# EAGLE board Oskar.Kuchejda (EAGLE 9.6.2)
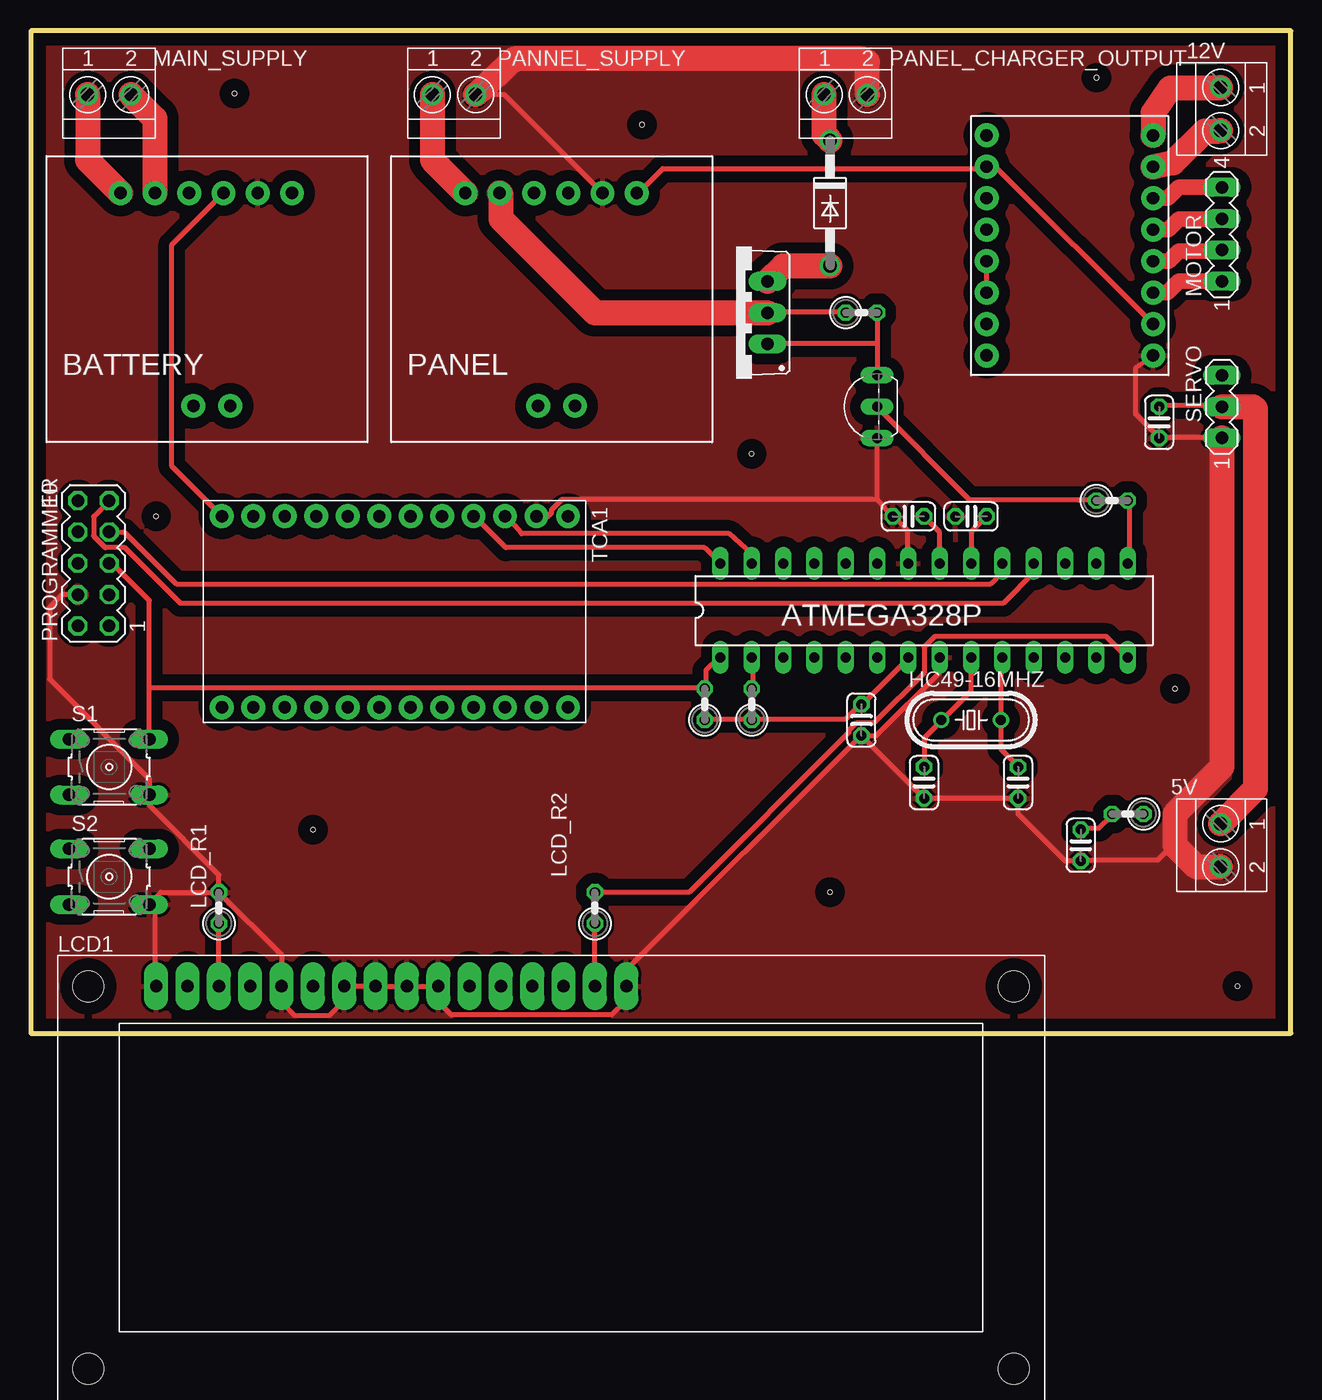
[diagram p0: board, top side]
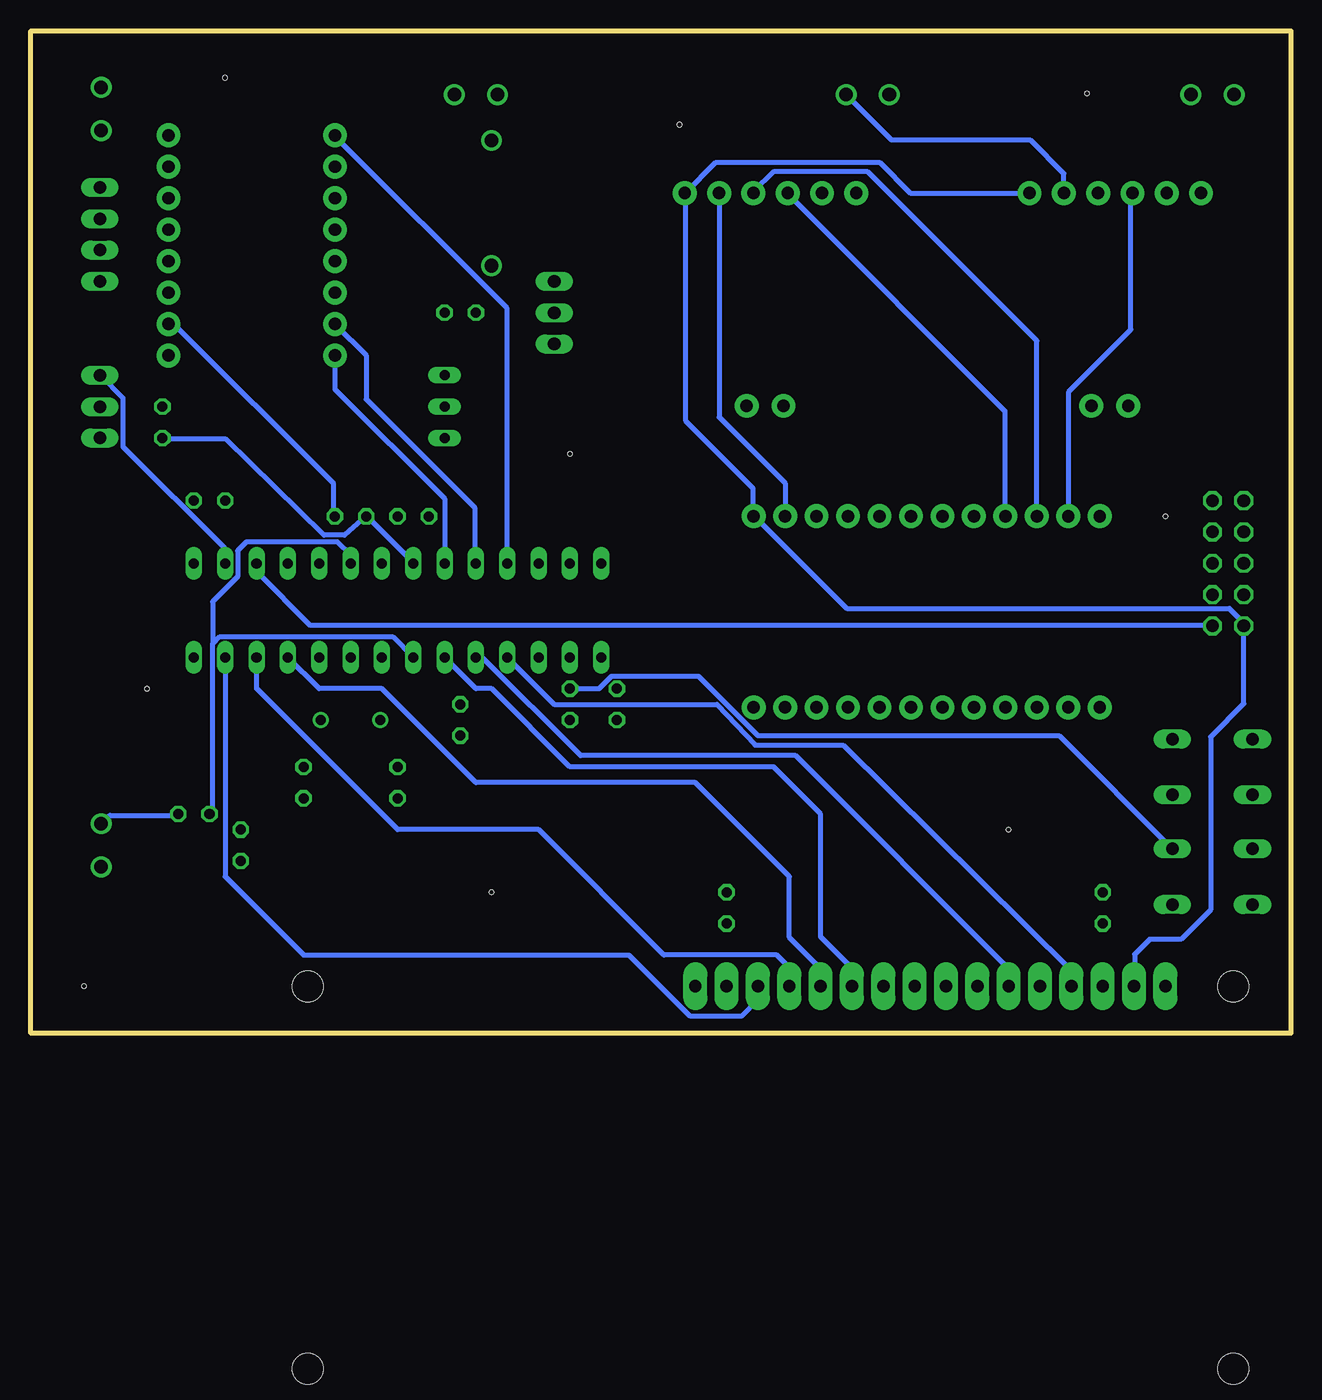
[diagram p1: board, bottom side, seen from below]

Size 102.11 x 81.27 mm. Coordinates in mm from the lower left corner, seen from the top.
Outline: 0,0 102.11,0 102.11,81.27 0,81.27 0,0
Copper layers (1*16): Top 0.035mm / dielectric 1.5mm / Bottom 0.035mm
Design rules "default": minimum track width 6mil, minimum drill 0.35mm, track to track 6mil, track to pad 6mil, pad to pad 6mil, via to via 6mil, smd to smd 6mil, copper to edge 40mil, drill to drill 6mil, minimum pad ring 10mil, minimum via ring 8mil, stop-mask expansion 4mil, vias tented up to drill 0mil, thermal gap 10mil
Holes 0.35 mm at 97.79,3.81 86.36,77.47 49.53,73.66 16.51,76.2 58.42,46.99 22.86,16.51 10.16,41.91 64.77,11.43 92.71,27.94

## Footprints (pad centres in the part's own frame; a part is rotated, then mirrored left to right if it is on the bottom)
0207/2V = drill 0.813 octagon: 1 -1.27,0; 2 1.27,0
TERMINAL-BLOCK-2-PIN-3.5MM-ROUND-PAD = drill 1.1 pad 1.7: 1 -1.75,-0.1; 2 1.75,-0.1
DIL28-3 = drill 0.813 long: 1 -16.51,-3.81; 2 -13.97,-3.81; 3 -11.43,-3.81; 4 -8.89,-3.81; 5 -6.35,-3.81; 6 -3.81,-3.81; 7 -1.27,-3.81; 8 1.27,-3.81; 9 3.81,-3.81; 10 6.35,-3.81; 11 8.89,-3.81; 12 11.43,-3.81; 13 13.97,-3.81; 14 16.51,-3.81; 15 16.51,3.81; 16 13.97,3.81; 17 11.43,3.81; 18 8.89,3.81; 19 6.35,3.81; 20 3.81,3.81; 21 1.27,3.81; 22 -1.27,3.81; 23 -3.81,3.81; 24 -6.35,3.81; 25 -8.89,3.81; 26 -11.43,3.81; 27 -13.97,3.81; 28 -16.51,3.81
INA219 = drill 1 pad 1.93: 2VIN+ 20.25,11.9; 2VIN- 20.25,14.89; GND 3,17.12; SCL 3,14.34; SDA 3,11.56; VCC 3,19.9; VIN+ 3,6; VIN- 3,8.78
C025-024X044 = drill 0.813 octagon: 1 -1.27,0; 2 1.27,0
HC49/S = drill 0.813: 1 -2.413,0; 2 2.413,0
TO220BV = drill 1.016 long: D 0,-2.54; G -2.54,-2.54; S 2.54,-2.54
HY-1602F = drill 1 pad 1.93 long: 1 2.54,0; 2 5.08,0; 3 7.62,0; 4 10.16,0; 5 12.7,0; 6 15.24,0; 7 17.78,0; 8 20.32,0; 9 22.86,0; 10 25.4,0; 11 27.94,0; 12 30.48,0; 13 33.02,0; 14 35.56,0; 15 38.1,0; 16 40.64,0 | hole 2.5: -2.96,0; 72.04,0; -2.96,-31; 72.04,-31
MA04-1 = drill 1.016 long: 1 -3.81,0; 2 -1.27,0; 3 1.27,0; 4 3.81,0
A4988 = drill 1 pad 1.93: 1A 14.75,9.26; 1B 14.75,6.71; 2A 14.75,11.81; 2B 14.75,14.36; DIR 1.26,1.61; EN 1.26,19.46; GND 14.75,1.61; GNDM 14.75,16.91; MS1 1.26,16.91; MS2 1.26,14.36; MS3 1.26,11.81; RST 1.26,9.26; SLP 1.26,6.71; STEP 1.26,4.16; VDD 14.75,4.16; VMOT 14.75,19.46
DO41-10 = drill 1.118: A 5.08,0; C -5.08,0
MA05-2 = drill 1.016 octagon: 1 -5.08,-1.27; 2 -5.08,1.27; 3 -2.54,-1.27; 4 -2.54,1.27; 5 0,-1.27; 6 0,1.27; 7 2.54,-1.27; 8 2.54,1.27; 9 5.08,-1.27; 10 5.08,1.27
B3F-10XX = drill 1.016 long: 1 -3.251,2.261; 2 3.251,2.261; 3 -3.251,-2.261; 4 3.251,-2.261
MA03-1 = drill 1.016 long: 1 -2.54,0; 2 0,0; 3 2.54,0
TO92-EBC-OVAL = drill 0.813 long: B 0,-1.27; C 2.54,-1.27; E -2.54,-1.27
TCA9548A = drill 1 pad 1.93: A0 1.26,16.81; A1 1.26,14.26; A2 1.26,11.71; GND 1.26,27.01; RST 1.26,19.36; SC0 1.26,6.61; SC1 1.26,1.51; SC2 16.76,4.06; SC3 16.76,9.16; SC4 16.76,14.26; SC5 16.76,19.36; SC6 16.76,24.46; SC7 16.76,29.56; SCL 1.26,21.91; SD0 1.26,9.16; SD1 1.26,4.06; SD2 16.76,1.51; SD3 16.76,6.61; SD4 16.76,11.71; SD5 16.76,16.81; SD6 16.76,21.91; SD7 16.76,27.01; SDA 1.26,24.46; VIN 1.26,29.56

## Placement (x,y rotation side)
2N2222_RESISTOR  1k  [0207/2V]  87.63,43.18 0 top
5V  TERMINAL-BLOCK-3.5MM-2-PIN-ROUND-PAD  [TERMINAL-BLOCK-2-PIN-3.5MM-ROUND-PAD]  96.52,15.24 270 top
12V  TERMINAL-BLOCK-3.5MM-2-PIN-ROUND-PAD  [TERMINAL-BLOCK-2-PIN-3.5MM-ROUND-PAD]  96.52,74.93 270 top
ATMEGA328P  MEGA8-P  [DIL28-3]  72.39,34.29 0 top
BATTERY  INA219  [INA219]  1.27,71.12 270 top
CAP_5V  1nf  [C025-024X044]  85.09,15.24 90 top
CAP_AREF  1nf  [C025-024X044]  71.12,41.91 0 top
CAP_SERVO  1nf  [C025-024X044]  91.44,49.53 90 top
CAP_VCC  1nf  [C025-024X044]  67.31,25.4 270 top
HC49-16MHZ  [HC49/S]  76.2,25.4 0 top
IND_C1NF  1nf  [C025-024X044]  76.2,41.91 0 top
IRLZ44N  IRF540  [TO220BV]  57.15,58.42 90 top
LCD1  LCD_2X16_SIL  [HY-1602F]  7.62,3.81 0 top
LCD_R1  2k  [0207/2V]  15.24,10.16 90 top
LCD_R2  1k  [0207/2V]  45.72,10.16 90 top
LOGIC_LEVEL_R  10k  [0207/2V]  67.31,58.42 0 top
MAIN_R  26  [0207/2V]  88.9,17.78 180 top
MAIN_SUPPLY  TERMINAL-BLOCK-3.5MM-2-PIN-ROUND-PAD  [TERMINAL-BLOCK-2-PIN-3.5MM-ROUND-PAD]  6.35,76.2 0 top
MOTOR  [MA04-1]  96.52,64.77 90 top
MOTOR_DRIVER  A4988  [A4988]  76.2,53.34 0 top
OSC_C1  22pf  [C025-024X044]  72.39,20.32 90 top
OSC_C2  22pf  [C025-024X044]  80.01,20.32 90 top
PANEL  INA219  [INA219]  29.21,71.12 270 top
PANEL_CHARGER_OUTPUT  TERMINAL-BLOCK-3.5MM-2-PIN-ROUND-PAD  [TERMINAL-BLOCK-2-PIN-3.5MM-ROUND-PAD]  66.04,76.2 0 top
PANEL_DIODE  1N4004  [DO41-10]  64.77,67.31 270 top
PANNEL_SUPPLY  TERMINAL-BLOCK-3.5MM-2-PIN-ROUND-PAD  [TERMINAL-BLOCK-2-PIN-3.5MM-ROUND-PAD]  34.29,76.2 0 top
PROGRAMMER  [MA05-2]  5.08,38.1 90 top
RESET_R  10k  [0207/2V]  54.61,26.67 90 top
RESET_R1  10k  [0207/2V]  58.42,26.67 90 top
S1  [B3F-10XX]  6.35,21.59 0 top
S2  [B3F-10XX]  6.35,12.7 0 top
SERVO  [MA03-1]  96.52,50.8 90 top
T1  2N2222  [TO92-EBC-OVAL]  67.31,50.8 90 top
TCA1  TCA9548A  [TCA9548A]  13.97,43.18 270 top

## Library data of the parts
2N2222_RESISTOR LCD_R1 LCD_R2 LOGIC_LEVEL_R MAIN_R RESET_R RESET_R1 = rcl; SPICEPREFIX: R
5V 12V MAIN_SUPPLY PANEL_CHARGER_OUTPUT PANNEL_SUPPLY = Rembrandt Electronics - Terminal Block 3-5mm v1-0
ATMEGA328P = atmel; OC_FARNELL: unknown; OC_NEWARK: unknown
BATTERY MOTOR_DRIVER PANEL TCA1 = TrackerSłonecznyLIB
CAP_5V CAP_AREF CAP_SERVO CAP_VCC IND_C1NF OSC_C1 OSC_C2 = rcl; SPICEPREFIX: C
HC49-16MHZ = crystal
IRLZ44N = transistor-power
LCD1 = lcd_2x16_led_backlight
MOTOR PROGRAMMER SERVO = con-lstb; OC_FARNELL: unknown; OC_NEWARK: unknown
PANEL_DIODE = diode
S1 S2 = switch-omron; MPN: B3F-1000; OC_FARNELL: 176432; OC_NEWARK: 36M3542
T1 = adafruit

## Nets
5V: ATMEGA328P.7 ATMEGA328P.20 BATTERY.VCC CAP_5V.2 CAP_VCC.1 IND_C1NF.2 LCD1.2 MAIN_R.2 MOTOR_DRIVER.MS1 MOTOR_DRIVER.VDD PANEL.VCC PROGRAMMER.2 RESET_R1.1 RESET_R.1 TCA1.VIN
GND: 5V.2 ATMEGA328P.8 ATMEGA328P.22 BATTERY.GND CAP_5V.1 CAP_AREF.1 CAP_SERVO.1 CAP_VCC.2 IND_C1NF.1 LCD1.1 LCD1.5 LCD1.7 LCD1.8 LCD1.9 LCD1.10 LCD1.16 LCD_R1.2 MOTOR_DRIVER.GND OSC_C1.1 OSC_C2.1 PANEL.GND PANEL_CHARGER_OUTPUT.2 PANNEL_SUPPLY.2 PROGRAMMER.4 S1.4 S2.4 SERVO.1 T1.E TCA1.GND
N$1: BATTERY.SCL TCA1.SC1
N$2: ATMEGA328P.9 HC49-16MHZ.1 OSC_C1.2
N$3: ATMEGA328P.10 HC49-16MHZ.2 OSC_C2.2
N$4: 2N2222_RESISTOR.2 ATMEGA328P.15
N$5: ATMEGA328P.16 SERVO.3
N$6: 5V.1 CAP_SERVO.2 MAIN_R.1 SERVO.2
N$7: BATTERY.SDA TCA1.SD1
N$8: ATMEGA328P.6 LCD1.11
N$9: MOTOR.1 MOTOR_DRIVER.1B
N$10: MOTOR.2 MOTOR_DRIVER.1A
N$11: ATMEGA328P.11 LCD1.12
N$12: ATMEGA328P.12 LCD1.13
N$13: ATMEGA328P.13 LCD1.14
N$14: PANEL.SDA TCA1.SD0
N$15: PANEL.SCL TCA1.SC0
N$16: MOTOR.3 MOTOR_DRIVER.2A
N$17: PANEL.VIN+ PANNEL_SUPPLY.1
N$18: ATMEGA328P.4 LCD1.4
N$19: BATTERY.VIN+ MAIN_SUPPLY.1
N$20: ATMEGA328P.27 TCA1.SDA
N$21: ATMEGA328P.28 TCA1.SCL
N$22: BATTERY.VIN- MAIN_SUPPLY.2
N$23: IRLZ44N.D LOGIC_LEVEL_R.1 PANEL.VIN-
N$24: ATMEGA328P.14 LCD_R2.2
N$25: ATMEGA328P.21 CAP_AREF.2
N$26: ATMEGA328P.1 PROGRAMMER.5 RESET_R.2 S1.2
N$27: MOTOR.4 MOTOR_DRIVER.2B
N$28: IRLZ44N.G LOGIC_LEVEL_R.2 T1.C
N$29: 12V.2 MOTOR_DRIVER.GNDM
N$30: 12V.1 MOTOR_DRIVER.VMOT
N$31: MOTOR_DRIVER.RST MOTOR_DRIVER.SLP
N$32: ATMEGA328P.23 MOTOR_DRIVER.DIR
N$33: ATMEGA328P.24 MOTOR_DRIVER.STEP
N$34: ATMEGA328P.25 MOTOR_DRIVER.EN
N$35: 2N2222_RESISTOR.1 T1.B
N$36: ATMEGA328P.2 RESET_R1.2 S2.2
N$38: PANEL_CHARGER_OUTPUT.1 PANEL_DIODE.C
N$39: IRLZ44N.S PANEL_DIODE.A
N$40: LCD1.15 LCD_R2.1
N$41: ATMEGA328P.17 PROGRAMMER.1
N$43: ATMEGA328P.19 PROGRAMMER.7
N$44: ATMEGA328P.18 PROGRAMMER.9
N$45: ATMEGA328P.5 LCD1.6
N$47: LCD1.3 LCD_R1.1

## Tracks (layer width: path | path; a pad name or v marks a point on that pad's centre or on a via)
5V
  Top 0.406: MOTOR_DRIVER.VDD 90.83,57.61 78.33,70.1 77.57,70.1 MOTOR_DRIVER.MS1 77.42,70.1 51.21,70.1 49.23,68.12 PANEL.VCC | ATMEGA328P.20 76.2,40.69 77.42,41.91 IND_C1NF.2 | CAP_5V.2 85.19,16.61 86.56,16.61 87.63,17.68 MAIN_R.2 | RESET_R.1 54.71,25.45 58.37,25.45 RESET_R1.1 58.52,25.45 65.99,25.45 67.21,26.67 CAP_VCC.1 67.36,26.67 71.17,30.48 ATMEGA328P.7
  Bottom 0.406: ATMEGA328P.20 76.2,38.76 77.27,39.83 84.63,39.83 85.34,39.12 85.34,37.02 87.38,34.99 87.38,31.56 | MOTOR_DRIVER.VDD 90.52,57.5 77.57,44.55 77.57,41.91 IND_C1NF.2 | LCD1.2 12.65,3.81 12.65,6.4 11.43,7.62 8.89,7.62 6.5,10.01 6.5,24.03 3.81,26.72 PROGRAMMER.2 3.81,33.27 4.98,34.44 35.97,34.44 43.43,41.91 TCA1.VIN 43.59,42.06 43.59,44.2 49.07,49.68 49.07,67.97 PANEL.VCC 49.07,68.12 46.58,70.61 33.33,70.61 30.84,68.12 21.18,68.12 BATTERY.VCC | ATMEGA328P.7 72.8,32.16 86.78,32.16 87.38,31.56 | MAIN_R.2 87.38,18.03 87.38,31.56
GND
  Top 0.406: LCD1.16 48.16,3.81 48.16,2.59 47.09,1.52 34.04,1.52 33.02,2.54 LCD1.10 LCD1.9 LCD1.8 LCD1.7 25.4,2.69 24.13,1.42 21.44,1.42 20.32,2.54 LCD1.5 20.32,6.35 LCD_R1.2 | LCD_R1.2 10.52,11.43 9.6,10.52 S2.4 9.6,10.36 10.06,9.91 10.06,3.81 LCD1.1 | LCD_R1.2 15.24,12.85 9.6,18.49 S1.4 9.6,20.62 1.52,28.7 1.52,34.54 2.54,35.56 PROGRAMMER.4 | CAP_VCC.2 OSC_C1.1 OSC_C2.1 80.01,17.78 83.82,13.97 CAP_5V.1 85.19,14.02 91.29,14.02 91.9,14.63 92.71,15.24 | CAP_VCC.2 68.53,24.13 73.66,29.26 ATMEGA328P.8 | CAP_VCC.2 67.36,24.23 48.26,5.13 LCD1.16 | 91.44,48.31 95.56,48.31 SERVO.1 | 91.44,48.31 89.53,50.22 89.56,50.24 89.56,53.95 MOTOR_DRIVER.GND | 91.44,48.31 CAP_SERVO.1 | PANEL.GND 38.35,76.1 PANNEL_SUPPLY.2 | ATMEGA328P.22 71.02,38.1 71.02,40.84 69.95,41.91 CAP_AREF.1 69.8,41.91 68.58,43.31 | 68.58,43.31 T1.E | 41,42.06 TCA1.GND 41.91,41.91 42.21,42.21 42.21,42.47 43.05,43.31 68.58,43.31 | 48.31,3.81 LCD1.16
  Top 2.032: PANEL_CHARGER_OUTPUT.2 67.79,78.76 67.31,78.99 39.18,78.99 PANNEL_SUPPLY.2 | SERVO.1 96.52,21.59 92.71,17.78 92.71,15.24 94.46,13.49 5V.2
  Bottom 0.406: BATTERY.GND 18.39,69.7 21.13,72.44 32.36,72.44 35.97,76.05 PANNEL_SUPPLY.2 | ATMEGA328P.22 71.02,38.1 74.83,41.91 IND_C1NF.1 74.98,41.91 76.68,40.39 78.36,40.39 86.31,48.16 91.44,48.16 CAP_SERVO.1 | PANEL.GND 46.33,67.97 46.33,49.94 40.98,44.59 TCA1.GND
  pour Top (isolate 0.889): 0,0 0,81.28 101.6,81.28 102.87,81.28 102.87,0
N$1
  Top 0.406: TCA1.SC1 11.43,45.97 11.43,63.94 BATTERY.SCL
N$2
  Top 0.406: OSC_C1.2 72.39,23.93 73.76,25.3 HC49-16MHZ.1 73.91,25.45 76.2,27.74 ATMEGA328P.9
N$3
  Top 0.406: OSC_C2.2 80.01,21.64 78.64,23.01 78.64,25.3 HC49-16MHZ.2 78.64,25.45 78.64,30.48 ATMEGA328P.10
N$4
  Top 0.406: ATMEGA328P.15 89,38.1 89,43.13 2N2222_RESISTOR.2
N$5
  Bottom 0.406: ATMEGA328P.16 86.41,38.1 86.41,39.32 94.64,47.55 94.64,51.51 96.47,53.34 SERVO.3
N$6
  Top 0.406: CAP_SERVO.2 91.44,50.9 95.56,50.9 SERVO.2
  Top 2.032: SERVO.2 99.06,50.8 99.24,50.62 99.24,19.81 5V.1
  Bottom 0.406: MAIN_R.1 90.22,17.68 95.71,17.68 96.32,17.07 5V.1
N$7
  Bottom 0.406: BATTERY.SDA 12.95,67.97 12.95,57.05 17.98,52.02 17.98,42.06 TCA1.SD1
N$8
  Bottom 0.406: LCD1.11 35.66,3.81 35.66,5.38 38.1,7.82 38.1,17.78 41.91,21.59 58.42,21.59 64.77,27.94 66.04,27.94 ATMEGA328P.6
N$9
  Top 1.27: MOTOR.1 93.02,60.96 92.11,60.05 MOTOR_DRIVER.1B
N$10
  Top 1.27: MOTOR_DRIVER.1A 92.22,62.6 93.02,63.4 96.47,63.4 MOTOR.2
N$11
  Bottom 0.406: LCD1.12 38.1,5.23 40.64,7.77 40.64,12.7 48.26,20.32 66.04,20.32 73.66,27.94 78.74,27.94 ATMEGA328P.11
N$12
  Bottom 0.406: LCD1.13 40.69,3.81 40.69,5.38 41.66,6.35 50.8,6.35 60.96,16.51 72.39,16.51 83.82,27.94 ATMEGA328P.12
N$13
  Bottom 0.406: 86.26,30.48 ATMEGA328P.13 86.36,12.7 80.01,6.35 53.65,6.35 48.72,1.42 44.45,1.42 43.18,2.69 LCD1.14
N$14
  Bottom 0.406: TCA1.SD0 23.16,42.06 23.16,50.44 40.69,67.97 PANEL.SDA
N$15
  Bottom 0.406: TCA1.SC0 20.58,56.14 34.29,69.85 41.91,69.85 43.55,68.21 PANEL.SCL
N$16
  Top 1.27: MOTOR_DRIVER.2A 92.18,65.15 93.02,65.99 96.47,65.99 MOTOR.3
N$17
  Top 2.032: PANNEL_SUPPLY.1 32.54,70.79 PANEL.VIN+
N$18
  Bottom 0.406: ATMEGA328P.4 59.69,26.67 46.51,26.67 43.41,23.37 36.27,23.37 17.78,5.08 LCD1.4
N$19
  Top 2.032: MAIN_SUPPLY.1 4.6,70.79 BATTERY.VIN+
N$20
  Top 0.406: ATMEGA328P.27 58.42,38.86 56.59,40.51 39.78,40.51 38.56,41.91 TCA1.SDA
N$21
  Top 0.406: ATMEGA328P.28 54.61,39.37 38.51,39.37 35.97,41.91 TCA1.SCL
N$22
  Top 2.032: MAIN_SUPPLY.2 10.05,74.15 BATTERY.VIN-
N$23
  Top 0.406: LOGIC_LEVEL_R.1 65.99,58.52 60.66,58.52 IRLZ44N.D
  Top 2.032: PANEL.VIN- 38.1,68.01 38.1,66.04 45.72,58.42 IRLZ44N.D
N$24
  Top 0.406: LCD_R2.2 53.34,11.43 66.29,24.38 66.29,24.55 66.89,25.15 68.33,25.15 72.39,29.21 72.39,31.31 73.24,32.16 87.17,32.16 88.85,30.48 ATMEGA328P.14
N$25
  Top 0.406: CAP_AREF.2 73.61,40.69 73.61,38.1 ATMEGA328P.21
N$26
  Top 0.406: ATMEGA328P.1 55.78,30.48 54.71,29.41 54.71,28.04 RESET_R.2 54.56,28.04 9.6,28.04 | PROGRAMMER.5 6.6,38.1 9.6,35.1 9.6,28.04 | S1.2 9.6,28.04
N$27
  Top 1.27: MOTOR.4 93.02,68.58 92.14,67.7 MOTOR_DRIVER.2B
N$28
  Top 0.406: LOGIC_LEVEL_R.2 68.58,55.93 | 68.58,55.93 T1.C | 68.58,55.93 59.74,55.93 IRLZ44N.G
N$29
  Top 2.032: 12V.2 96.32,73.15 95.15,73.15 92.56,70.56 MOTOR_DRIVER.GNDM
N$30
  Top 2.032: 12V.1 96.32,76.66 92.36,76.66 90.95,74.63 MOTOR_DRIVER.VMOT
N$31
  Top 0.406: MOTOR_DRIVER.SLP 77.42,60.2 77.42,62.48 MOTOR_DRIVER.RST
N$32
  Bottom 0.406: ATMEGA328P.23 68.58,43.33 77.46,52.21 MOTOR_DRIVER.DIR
N$33
  Bottom 0.406: ATMEGA328P.24 66.14,38.1 66.14,42.62 74.93,51.41 74.93,54.97 77.42,57.45 MOTOR_DRIVER.STEP
N$34
  Bottom 0.406: ATMEGA328P.25 63.55,38.1 63.55,58.83 77.42,72.69 MOTOR_DRIVER.EN
N$35
  Top 0.406: 2N2222_RESISTOR.1 86.26,43.28 76.05,43.28 68.58,50.75 T1.B
N$36
  Top 0.406: RESET_R1.2 58.52,28.04 58.52,30.48 ATMEGA328P.2
  Bottom 0.406: S2.2 18.77,24.13 43.18,24.13 48.01,28.96 55.03,28.96 56.05,27.94 RESET_R1.2
N$38
  Top 2.032: PANEL_DIODE.C 64.29,72.87 PANEL_CHARGER_OUTPUT.1
N$39
  Top 2.032: IRLZ44N.S 60.96,62.23 PANEL_DIODE.A
N$40
  Top 0.406: LCD1.15 LCD_R2.1
N$41
  Bottom 0.406: ATMEGA328P.17 83.82,37.44 79.45,33.07 6.4,33.07 PROGRAMMER.1
N$43
  Top 0.406: ATMEGA328P.19 78.74,37.39 77.78,36.42 11.79,36.42 7.57,40.64 PROGRAMMER.7
N$44
  Top 0.406: ATMEGA328P.18 81.28,37.34 78.79,34.85 12.14,34.85 7.62,39.37 6.04,39.37 5.08,40.33 5.08,41.91 PROGRAMMER.9
N$45
  Bottom 0.406: ATMEGA328P.5 65.53,30.48 57.56,22.5 40.13,22.5 22.86,5.23 LCD1.6
N$47
  Top 0.406: LCD1.3 LCD_R1.1